# EAGLE board displayNEU (EAGLE 9.5.1)
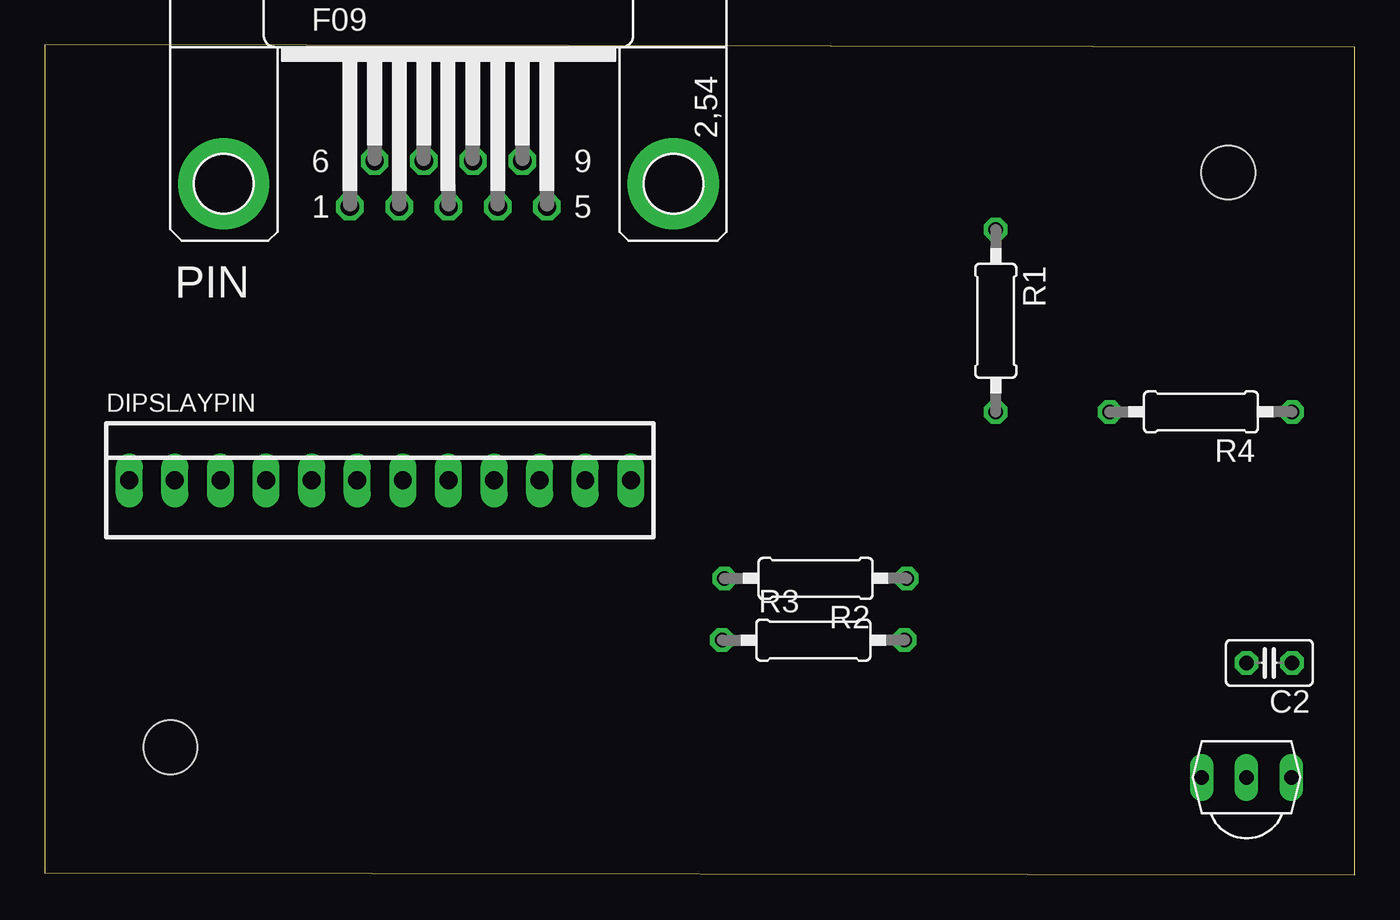
[diagram p0: board, top side]
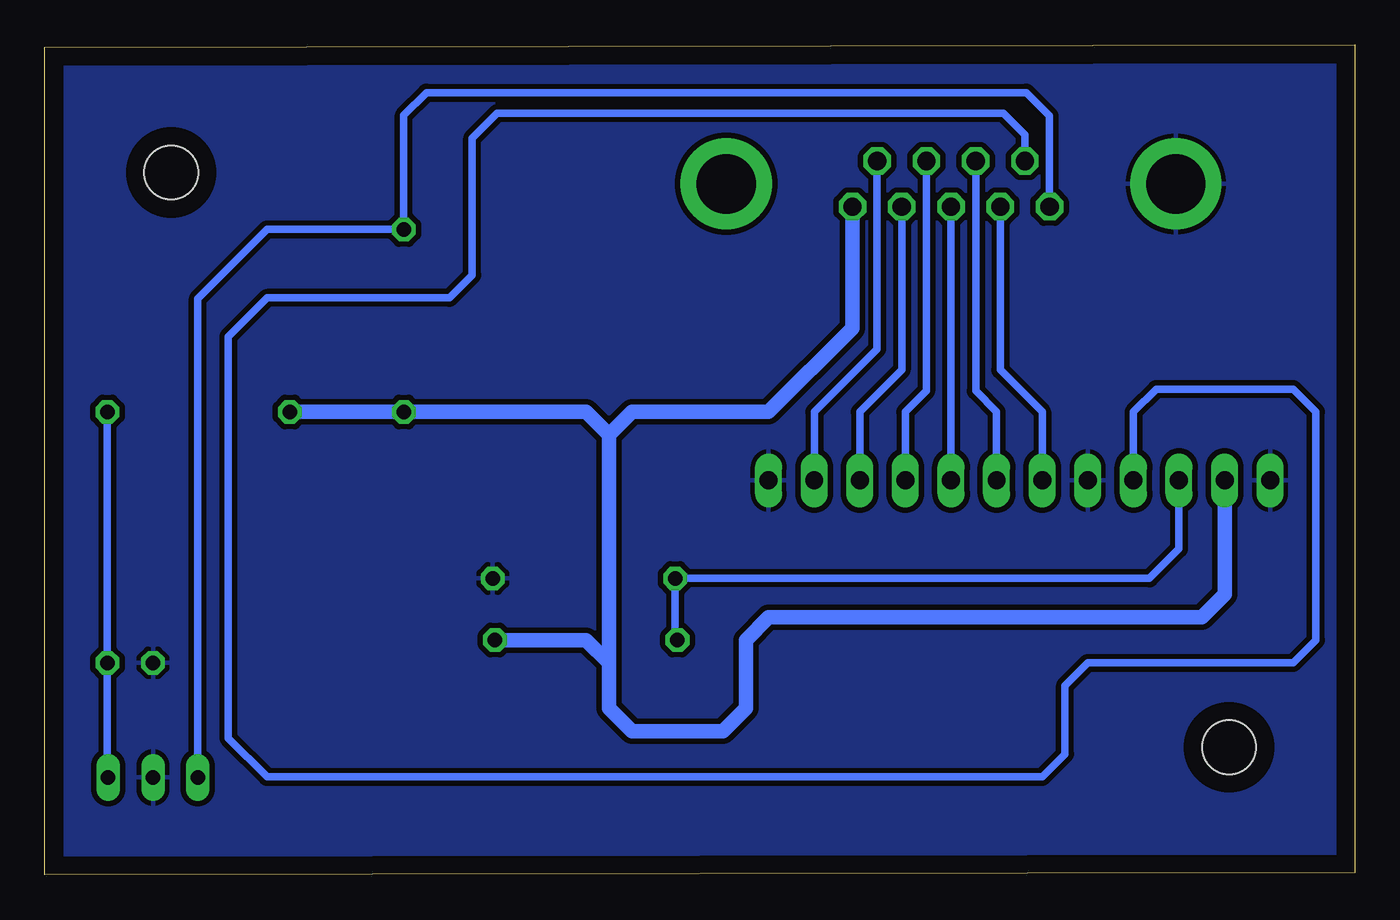
[diagram p1: board, bottom side, seen from below]

Size 72.95 x 46.22 mm. Coordinates in mm from the lower left corner, seen from the top.
Outline: 0,0.13 72.95,0 72.95,46.09 0,46.22 0,0.13
Copper layers (1*16): Top 0.035mm / dielectric 1.5mm / Bottom 0.035mm
Design rules "default *": minimum track width 6mil, minimum drill 0.35mm, track to track 6mil, track to pad 6mil, pad to pad 6mil, via to via 6mil, smd to smd 6mil, copper to edge 40mil, drill to drill 6mil, minimum pad ring 10mil, minimum via ring 8mil, stop-mask expansion 4mil, vias tented up to drill 0mil, thermal gap 10mil
Holes 3 mm at 6.99,7.11 65.91,39.12

## Footprints (pad centres in the part's own frame; a part is rotated, then mirrored left to right if it is on the bottom)
C025-025X050 = drill 0.813 octagon: 1 -1.27,0; 2 1.27,0
22-23-2121 = drill 1 long: 1 -13.97,0; 2 -11.43,0; 3 -8.89,0; 4 -6.35,0; 5 -3.81,0; 6 -1.27,0; 7 1.27,0; 8 3.81,0; 9 6.35,0; 10 8.89,0; 11 11.43,0; 12 13.97,0
F09HP = drill 1.016 octagon: 1 -5.486,-1.27; 2 -2.743,-1.27; 3 0,-1.27; 4 2.743,-1.27; 5 5.486,-1.27; 6 -4.115,1.27; 7 -1.372,1.27; 8 1.372,1.27; 9 4.115,1.27 | drill 3.302 pad 5.08: G1 -12.522,0; G2 12.522,0
0207/10 = drill 0.813 octagon: 1 -5.08,0; 2 5.08,0
TSOP18XX = drill 0.813 long: GND -0.001,-0.027; OUT -2.501,-0.027; VCC 2.499,-0.027

## Placement (x,y rotation side)
C2  100nF  [C025-025X050]  68.2,11.81 180 top
DIPSLAYPIN  22-23-2121  [22-23-2121]  18.67,21.97 0 top
PIN  DSUB9  [F09HP]  22.48,38.48 0 top
R1  10k  [0207/10]  52.96,30.86 270 top
R2  1k5  [0207/10]  42.93,16.51 180 top
R3  7k7  [0207/10]  42.8,13.08 0 top
R4  10R  [0207/10]  64.39,25.78 180 top
U$1  TSOP4838  [TSOP18XX]  66.93,5.46 0 top

## Library data of the parts
C2 = rcl; SPICEPREFIX: C
DIPSLAYPIN = con-molex; MF: MOLEX; MPN: 22-23-2121; OC_FARNELL: 1462935; OC_NEWARK: 56H0456
PIN = con-subd; OC_FARNELL: unknown; OC_NEWARK: unknown
R1-R4 = rcl; SPICEPREFIX: R
U$1 = tsop

## Nets
GND: C2.2 DIPSLAYPIN.1 DIPSLAYPIN.5 DIPSLAYPIN.12 PIN.G1 R2.1 U$1.GND
N$1: DIPSLAYPIN.6 PIN.2
N$2: DIPSLAYPIN.7 PIN.7
N$3: DIPSLAYPIN.8 PIN.3
N$4: DIPSLAYPIN.9 PIN.8
N$5: DIPSLAYPIN.10 PIN.4
N$6: DIPSLAYPIN.11 PIN.9
N$7: PIN.1 R1.1 U$1.OUT
N$8: DIPSLAYPIN.4 PIN.6
N$9: DIPSLAYPIN.3 R2.2 R3.1
N$10: C2.1 R4.1 U$1.VCC
VCC: DIPSLAYPIN.2 PIN.5 R1.2 R3.2 R4.2

## Tracks (layer width: path | path; a pad name or v marks a point on that pad's centre or on a via)
GND
  pour Bottom (isolate 0.305): 0.95,45.09 71.95,45.09 71.95,1.09 0.95,1.09
N$1
  Bottom 0.406: PIN.2 19.74,28.12 17.4,25.78 DIPSLAYPIN.6
N$2
  Bottom 0.406: PIN.7 21.11,26.95 19.94,25.78 DIPSLAYPIN.7
N$3
  Bottom 0.406: PIN.3 DIPSLAYPIN.8
N$4
  Bottom 0.406: PIN.8 23.85,26.95 25.02,25.78 DIPSLAYPIN.9
N$5
  Bottom 0.406: PIN.4 25.22,28.12 27.56,25.78 DIPSLAYPIN.10
N$6
  Bottom 0.406: PIN.9 26.59,29.29 30.1,25.78 DIPSLAYPIN.11
N$7
  Bottom 0.406: U$1.OUT 64.43,32.09 60.58,35.94 R1.1 52.96,42.29 51.69,43.56 18.29,43.56 16.99,42.27 PIN.1
N$8
  Bottom 0.406: PIN.6 18.36,41.22 19.56,42.42 47.75,42.42 49.15,41.02 49.15,33.4 50.42,32.13 60.58,32.13 62.74,29.97 62.74,7.62 60.58,5.46 17.4,5.46 16.13,6.73 16.13,10.54 14.86,11.81 3.43,11.81 2.16,13.08 2.16,25.78 3.43,27.05 11.05,27.05 12.32,25.78 DIPSLAYPIN.4
N$9
  Bottom 0.406: DIPSLAYPIN.3 9.78,18.16 11.43,16.51 R2.2 37.85,13.21 R3.1
N$10
  Bottom 0.406: R4.1 C2.1 69.47,5.48 U$1.VCC
VCC
  Bottom 0.813: DIPSLAYPIN.2 7.24,15.62 8.51,14.35 32.64,14.35 33.91,13.08 33.91,9.27 35.18,8 40.26,8 41.53,9.27 41.53,11.81 | 41.53,11.81 41.53,24.51 | 41.53,24.51 42.8,25.78 R1.2 R4.2 | 41.53,11.81 42.8,13.08 R3.2 | PIN.5 27.96,30.46 32.64,25.78 40.26,25.78 41.53,24.51